# Altium PCB PMBV3.PcbDoc
Units mm, origin at the board's own origin, x right, y up, seen from the top; angles counter-clockwise.
Board outline 30 x 65 mm, 2 copper layers (Top Layer, Bottom Layer); 71 components, 30 nets, 160 pads, 96 vias.
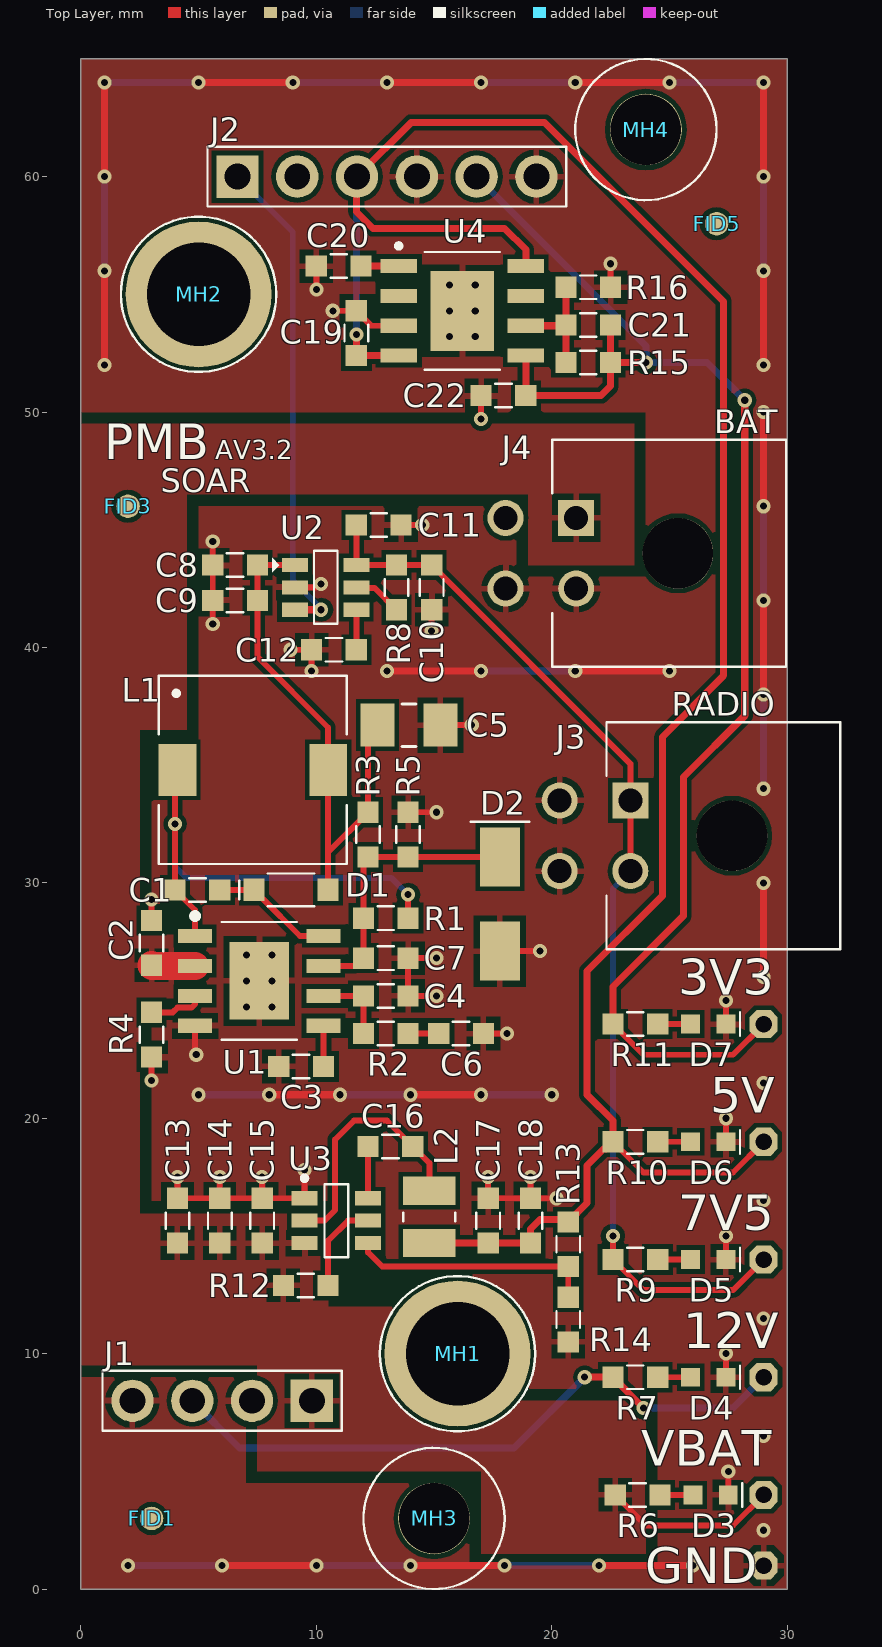
[diagram p0: Top Layer view]
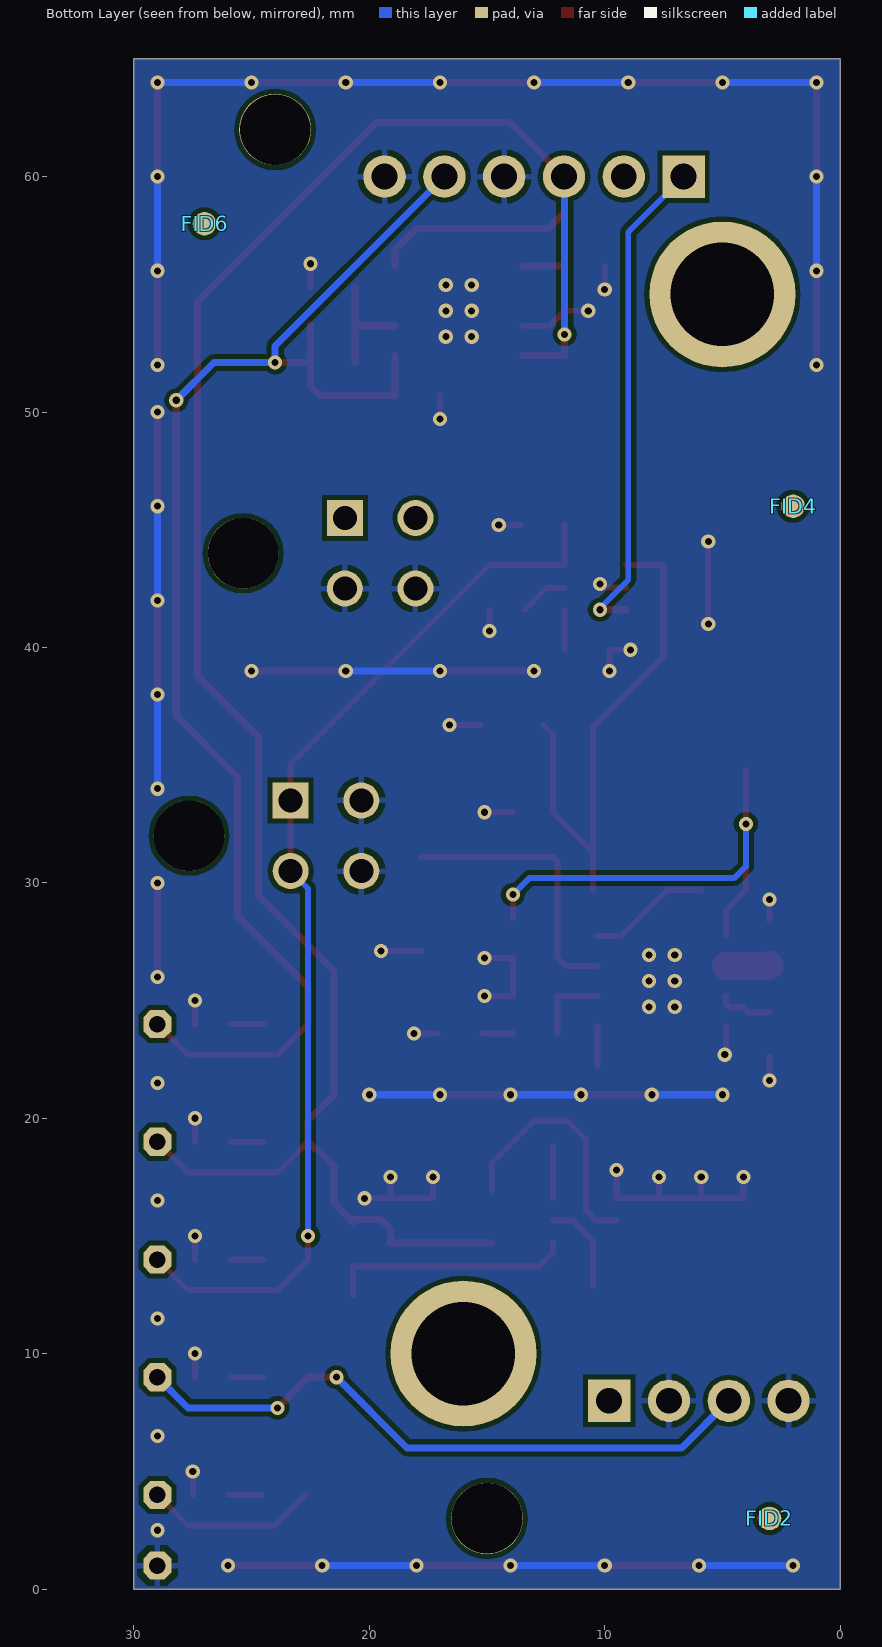
[diagram p1: Bottom Layer view, seen from below]
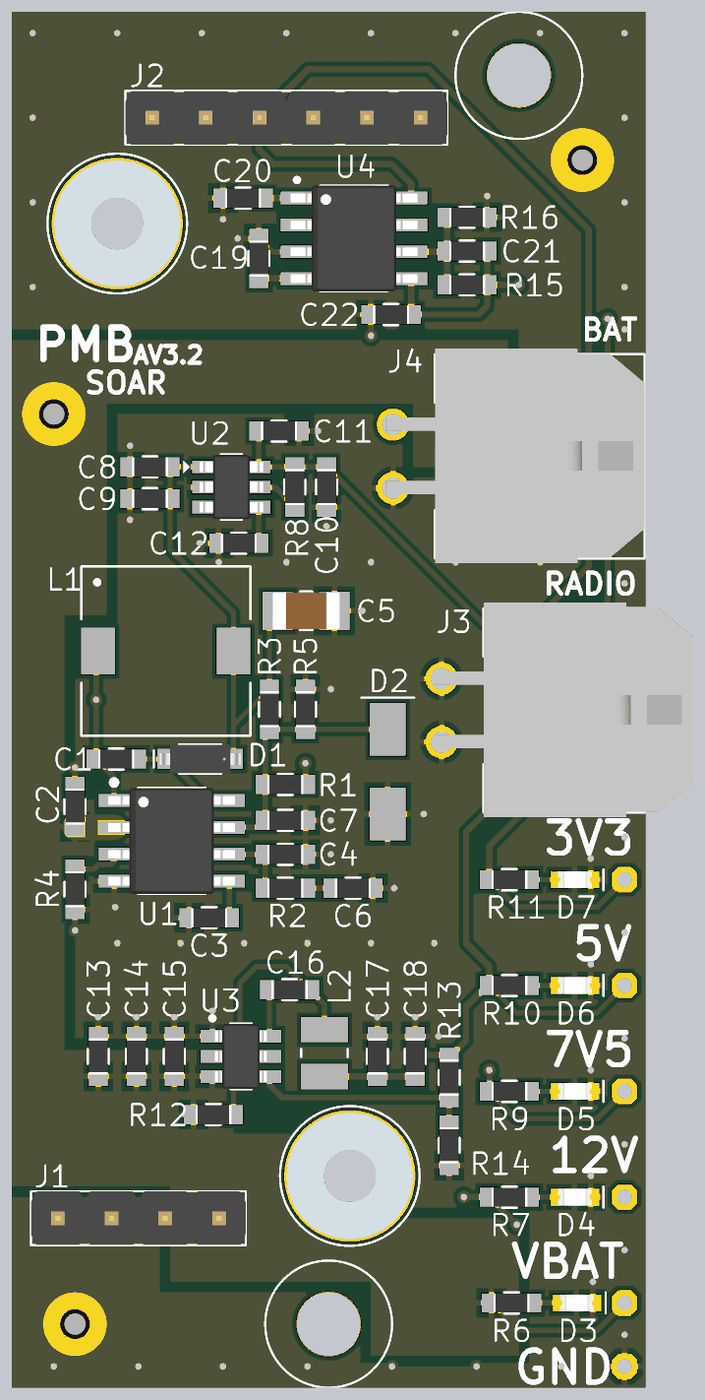
[diagram p2: 3D render of the assembled board from above, using the file's embedded part models]

## Layer stack, top to bottom
Top Solder: solder mask 0.0102, Solder Resist, Dk 3.5
Top Layer: signal copper 0.0356
Dielectric 1: dielectric 0.32, FR-4, Dk 4.8
Bottom Layer: signal copper 0.0356
Bottom Solder: solder mask 0.0102, Solder Resist, Dk 3.5

## Board outline
0,0 30,0 30,65 0,65

## Design rules (kind name [scope] priority, off if disabled: settings)
Clearance [All] p1: gap=0.2 ignorepadtopadclearanceinfootprint=FALSE except(0: Arc-Hole Track-Hole SMDPad-Hole THPad-Hole Via-Hole Fill-Hole Poly-Hole Region-Hole Text-Hole; 0.15: Arc-Arc Arc-Track Track-Track)
DiffPairsRouting [All] p1: maxlimit=0.25 minlimit=0.15 mostfreqgap=0.15 toplayer_minwidth=0.15 toplayer_maxwidth=0.25 toplayer_prefwidth=0.25 bottomlayer_minwidth=0.15 bottomlayer_maxwidth=0.25 bottomlayer_prefwidth=0.25 maxuncoupledlength=12.7
Height [All] p1: minheight=0 maxheight=30 prefheight=12.7
HoleSize [All] p1: absolutevalues=TRUE maxlimit=5 minlimit=0.3 maxpercent=80.000 minpercent=20.000
MinimumSolderMaskSliver [All] p1: minsoldermaskwidth=0.076
PolygonConnect [All] p1: thpad.connectstyle=Relief thpad.reliefconductorwidth=0.254 thpad.reliefentries=4 thpad.polygonreliefangle="90 Angle" thpad.airgapwidth=0.254 smdpad.connectstyle=Relief smdpad.reliefconductorwidth=0.254 smdpad.reliefentries=4 smdpad.polygonreliefangle="90 Angle" smdpad.airgapwidth=0.254 via.connectstyle=Direct via.reliefconductorwidth=0.254 via.reliefentries=4 via.polygonreliefangle="90 Angle" via.airgapwidth=0.254
RoutingVias [All] p1: holewidth=0.35 width=0.7 viastyle="Through Hole" minholewidth=0.25 minwidth=0.5 maxholewidth=0.711 maxwidth=1.27
SilkToSilkClearance [All] p1: silktosilkclearance=0.1
SilkToSolderMaskClearance [IsPad] p1: minsilkscreentomaskgap=0.09 clearancetoexposedcopper=TRUE
SolderMaskExpansion SolderMaskExpansion_Vias [IsVia] p1: expansion=0 istentingtop=TRUE
SolderMaskExpansion [All] p2: expansion=0.05 istentingtop=FALSE
Width [All] p1: maxlimit=2 minlimit=0.2 preferedwidth=0.25 minimp=50.000000 maximp=50.000000 favimp=50.000000
24 further rules are at their usual default settings.

## Components (designator, comment, footprint, x,y, rotation, side; value= is the part's Value field where it differs from the comment)
3V3 "Testpoint" Testpoint 29,24 r90 top locked
5V "Testpoint" Testpoint 29,19 r0 top locked
7V5 "Testpoint" Testpoint 29,14 r90 top locked
12V "Testpoint" Testpoint 29,9 r90 top locked
C1 "CGA3E3X7R1E334K080AB" 0603[1608] 4.95,29.7 r0 top
C2 "CL10A475KA8NQNC" 0603[1608] 3,27.45 r270 top
C3 "CC0603KRX7R9BB223" 0603[1608] 9.35,22.2 r0 top
C4 "CC0603JRNPO9BN220" 0603[1608] 12.95,25.2 r180 top
C5 "C3216X5R1E476M160AC" 1206[3216] 13.936,36.7 r180 top
C6 "CC0603KRX7R9BB821" 0603[1608] 16.15,23.6 r180 top
C7 "CC0603KRX7R9BB221" 0603[1608] 12.95,26.8 r180 top
C8 "CL10A106MP8NNNC" 0603[1608] 6.55,43.5 r0 top
C9 "CGA3E2X7R1E104K080AA" 0603[1608] 6.55,42 r0 top
C10 "CL10A105KP8NNNC" 0603[1608] 14.9,42.55 r90 top
C11 "CGA3E2X7R1E104K080AA" 0603[1608] 12.65,45.2 r180 top
C12 "CGA3E2X7R1H103K080AA" 0603[1608] 10.75,39.9 r180 top
C13 "CL10A106MP8NNNC" 0603[1608] 4.1,15.65 r270 top
C14 "CL10A106MP8NNNC" 0603[1608] 5.9,15.65 r270 top
C15 "CGA3E2X7R1E104K080AA" 0603[1608] 7.7,15.65 r270 top
C16 "CGA3E2X7R1E104K080AA" 0603[1608] 13.15,18.8 r0 top
C17 "C1608X5R1A226M080AC" 0603[1608] 17.3,15.65 r270 top
C18 "C1608X5R1A226M080AC" 0603[1608] 19.1,15.65 r270 top
C19 "CL10A475KA8NQNC" 0603[1608] 11.7,53.35 r270 top
C20 "GRM1885C1H103JA01D" 0603[1608] 10.95,56.2 r0 top
C21 "C0603C102K3GACTU" 0603[1608] 21.55,53.7 r0 top
C22 "CL10A106MP8NNNC" 0603[1608] 17.95,50.7 r0 top
D1 "1N4148W-7-F" 1N4148W-7-F 8.925,29.7 r180 top
D2 "B330A-13-F" B330A-13-F 17.8,29.1 r90 top
D3 "LTST-C191KGKT" LTST-C191KGKT 26.75,4 r180 top
D4 "LTST-C191KGKT" LTST-C191KGKT 26.65,9 r180 top
D5 "LTST-C191KGKT" LTST-C191KGKT 26.65,14 r180 top
D6 "LTST-C191KGKT" LTST-C191KGKT 26.65,19 r180 top
D7 "LTST-C191KGKT" LTST-C191KGKT 26.65,24 r180 top
FID1 "FID_1MM_ROUND_SL" FID_1MM_ROUND_SL 3,3 r0 top
FID2 "FID_1MM_ROUND_SL" FID_1MM_ROUND_SL 3,3 r90 bottom
FID3 "FID_1MM_ROUND_SL" FID_1MM_ROUND_SL 2,46 r90 top
FID4 "FID_1MM_ROUND_SL" FID_1MM_ROUND_SL 2,46 r90 bottom
FID5 "FID_1MM_ROUND_SL" FID_1MM_ROUND_SL 27,58 r90 top
FID6 "FID_1MM_ROUND_SL" FID_1MM_ROUND_SL 27,58 r90 bottom
GND "Testpoint" Testpoint 29,1 r90 top locked
J1 "61300411121" 61300411121 6,8 r180 top locked
J2 "61300611121" 61300611121 13,60 r0 top locked
J3 "0430450400" 0430450400 24,32 r90 top locked
J4 "0430450400" 0430450400 21.7,44 r90 top locked
L1 "744777003" 744777003 7.3,34.8 r90 top value=3.3uH
L2 "DFE252012P-4R7M=P2" DFE252012P-4R7M=P2 14.8,15.81 r270 top value=4.7uH
MH1 "9774110360R" Standoff 16,10 r0 top locked
MH2 "9774110360R" Standoff 5,55 r0 top locked
MH3 "Mounting Hole" MOUNT-HOLE 15,3 r0 top locked
MH4 "Mounting Hole" MOUNT-HOLE 24,62 r0 top locked
R1 "RC0603FR-071RL" 0603[1608] 12.95,28.5 r0 top
R2 "ERA-3AEB4752V" 0603[1608] 12.95,23.6 r180 top
R3 "RT0603DRE076K49L" 0603[1608] 12.2,32.05 r90 top
R4 "ERA-3AEB1582V" 0603[1608] 3,23.55 r90 top
R5 "RC0603FR-071KL" 0603[1608] 13.9,32.05 r270 top
R6 "ERA-3AEB2491V" 0603[1608] 23.65,4 r0 top
R7 "ERA-3AEB2491V" 0603[1608] 23.55,9 r0 top
R8 "CRGCQ0603F220R" 0603[1608] 13.4,42.55 r90 top
R9 "MCT06030C1301FP500" 0603[1608] 23.55,14 r0 top
R10 "ESR03EZPJ751" 0603[1608] 23.55,19 r0 top
R11 "RC1608F331CS" 0603[1608] 23.55,24 r0 top
R12 "ERJ-3GEYJ103V" 0603[1608] 9.55,12.9 r180 top
R13 "RC0603FR-0754K9L" 0603[1608] 20.7,14.65 r270 top
R14 "ERJ-3GEYJ103V" 0603[1608] 20.7,11.45 r90 top
R15 "ERJ-3EKF2211V" 0603[1608] 21.55,52.1 r0 top
R16 "RC0603FR-071KL" 0603[1608] 21.55,55.3 r180 top
U1 "SC4525ESETRT" SOIC127P600X175_HS-9N 7.575,25.835 r0 top
U2 "TPS22810DBVR" SOT95P280X145-6N 10.4,42.55 r0 top
U3 "TPS562208DDCT" TPS562208DDCT 10.85,15.65 r0 top
U4 "LP3878MRX-ADJ/NOPB" SOIC127P600X170_HS-9N 16.2,54.3 r0 top
VBAT "Testpoint" Testpoint 29,4 r90 top locked

## Footprints (in the part's own frame and the unit in brackets; to place one, negate y for a bottom-side part, rotate by r counter-clockwise, add the part's x,y. Pads: shape width x height; smd on the part's side, far side on the other; paste and mask are expansions set on the pad)
1N4148W-7-F [mm] "SOD123"
  rect 0.9x0.95 smd mask+0.05: 1(-1.575,0) 2(1.575,0)
  silkscreen extent -1,-0.7 2.2,0.7, body extent -1.92,-0.67 1.93,0.68, height 0.81
0603[1608] [mm]
  rect 0.9x0.9 smd mask+0.05: 1(-0.95,0) 2(0.95,0)
  silkscreen extent -0.35,-0.5 0.35,0.5, body extent -0.85,-0.45 0.85,0.45, height 0.55
1206[3216] [mm] "1206 Ceramic Capacitor"
  rect 1.44x1.82 smd: 1(-1.336,0) 2(1.336,0)
  silkscreen extent -0.29,-0.9 0.29,0.9, body extent -1.6,-0.9 1.6,0.9, height 1.6
0430450400 [mm] "4-Pin Molex 3.00mm Pitch"
  round 3 hole 3 unplated mask+0.05: 0(0,-3.66)
  rect 1.53x1.53 hole 1.02 mask+0.05: 1(1.5,0.66)
  round 1.53 hole 1.02 mask+0.05: 2(-1.5,0.66) 3(1.5,3.66) 4(-1.5,3.66)
  silkscreen extent -4.82,-8.25 4.83,1.67, body extent -5.05,-8.25 5.1,3.99, height 8.83
744777003 [mm] "SMT SHIELDED POWER INDUCTOR SIZE"
  rect 2.2x1.6 smd mask+0.05: 1(0,3.2) 2(0,-3.2)
  silkscreen extent -4,-4 4,4, body extent -4,-4 4,4, height 4.5
61300411121 [mm] "CONN HEADER VERT 4POS 2.54MM"
  rect 1.8x1.8 hole 1.1 mask+0.05: 1(-3.81,0)
  round 1.8 hole 1.1 mask+0.05: 2(-1.27,0) 3(1.27,0) 4(3.81,0)
  silkscreen extent -5.08,-1.27 5.08,1.27, body extent -5.08,-1.27 5.08,1.27, height 8.57
61300611121 [mm] "CONN HEADER VERT 6POS 2.54MM"
  rect 1.8x1.8 hole 1.1 mask+0.05: 1(-6.35,0)
  round 1.8 hole 1.1 mask+0.05: 2(-3.81,0) 3(-1.27,0) 4(1.27,0) 5(3.81,0) 6(6.35,0)
  silkscreen extent -7.62,-1.27 7.62,1.27, body extent -7.62,-1.27 7.62,1.27, height 8.57
B330A-13-F [mm] "DIODE SCHOTTKY 30V 3A SMA"
  rect 2.5x1.7 smd mask+0.05: 1(-2,0) 2(2,0)
  silkscreen extent 3.5,-1.25 3.5,1.25, body extent -2.75,-1.46 2.75,1.46, height 2.5
DFE252012P-4R7M=P2 [mm] "FIXED IND 4.7UH 2A 200 MOHM SMD"
  rect 1.2x2.22 smd: 1(-1.11,0) 2(1.11,0)
  silkscreen extent -0.19,-1.1 0.19,1.1, body extent -1.25,-1 1.25,1, height 1.2
FID_1MM_ROUND_SL [mm] "Fiducial 1MM Round Single Layer"
  round 1 smd mask+1: 0(0,0)
LTST-C191KGKT [mm] "Green 571nm LED Indication - Discrete 2V 0603"
  rect 0.8x0.8 smd paste-3 mask+0.05: 1(-0.75,0) 2(0.75,0)
  silkscreen extent -1.35,-0.5 -1.35,0.5, body extent -0.8,-0.4 0.8,0.4, height 0.8
MOUNT-HOLE [mil] "#4, 0.116in"
  round 120 hole 118 unplated mask+1.97: 0(0,0)
  silkscreen extent -118,-118 118,118, body extent 0,128 0,128, height 10
SOIC127P600X170_HS-9N [mm] "SOIC, 8-Leads, Body 4.90x3.90mm, Pitch 1.27mm, Thermal Pad 3.40x2.71mm, IPC Medium Density"
  rect 1.55x0.6 smd: 1(-2.7,1.905) 2(-2.7,0.635) 3(-2.7,-0.635) 4(-2.7,-1.905) 5(2.7,-1.905) 6(2.7,-0.635) 7(2.7,0.635) 8(2.7,1.905)
  rect 2.71x3.4 smd: 9(0,0)
  silkscreen extent -2.8,-2.5 1.6,2.85, body extent -3,-2.5 3,2.5, height 1.7
SOIC127P600X175_HS-9N [mm] "SOIC, 8-Leads, Body 4.90x3.90mm, Pitch 1.27mm, Thermal Pad 3.30x2.51mm, IPC Medium Density"
  rect 1.45x0.6 smd: 1(-2.725,1.905) 2(-2.725,0.635) 3(-2.725,-0.635) 4(-2.725,-1.905) 5(2.725,-1.905) 6(2.725,-0.635) 7(2.725,0.635) 8(2.725,1.905)
  rect 2.51x3.3 smd: 9(0,0)
  silkscreen extent -2.85,-2.5 1.6,2.88, body extent -3,-2.5 3,2.5, height 1.75
SOT95P280X145-6N [mm] "SOT23, 6-Leads, Body 2.90x2.80mm, Pitch 0.95mm, IPC Medium Density"
  rect 1.1x0.6 smd mask+0.07: 1(-1.3,0.95) 2(-1.3,0) 3(-1.3,-0.95) 4(1.3,-0.95) 5(1.3,0) 6(1.3,0.95)
  silkscreen extent -2.27,-1.55 0.5,1.55, body extent -1.5,-1.53 1.5,1.53, height 1.45
Standoff [mm] "#4, 0.116in"
  round 6.2 hole 4.4 unplated mask+0.05: 0(0,0)
  silkscreen extent -3.3,-3.3 3.3,3.3, body extent -3,-3 3,3, height 11
Testpoint [mm] "0.7MMD, 1.2MMW, 1.2MML"
  oct 1.2x1.2 hole 0.7 mask+0.05: 1(0,0)
TPS562208DDCT [mm] "IC REG BUCK ADJ 2A TSOT23-6"
  rect 1.1x0.6 smd: 1(-1.35,0.95) 2(-1.35,0) 3(-1.35,-0.95) 4(1.35,-0.95) 5(1.35,0) 6(1.35,0.95)
  silkscreen extent -1.45,-1.55 0.5,1.9, body extent -1.25,-1.52 1.25,1.53, height 1.1

## Part data
3V3 5V 7V5 12V GND VBAT: "TESTPOINT 0.7MMD Hole, 1.2MMW, 1.2MML"
C1: "CAP CER 0.33UF 25V X7R 0603", Capacitance=0.33µF, Manufacturer="TDK Corporation", Operating Temperature="-55°C ~ 125°C", Package / Case="0603 (1608 Metric)", Supplier Part Number 1=445-12544-1-ND, Temperature Coefficient=X7R, Tolerance=±10%, Voltage - Rated=25V, ComponentLink1Description=Datasheet, ComponentLink1URL=https://content.kemet.com/datasheets/KEM_C1003_C0G_SMD.pdf, Manufacturer Part Number=CGA3E3X7R1E334K080AB, Mounting Type="Surface Mount, MLCC", Size / Dimension="0.063\" L x 0.031\" W (1.60mm x 0.80mm)", Supplier 1=Digi-Key, Thickness (Max)="0.034\" (0.87mm)"
C2 C19: "CAP CER 4.7UF 25V X5R 0603", Capacitance=4.7uF, Manufacturer="Samsung Electro-Mechanics", Operating Temperature="-55°C ~ 85°C", Package / Case="0603 (1608 Metric)", Supplier Part Number 1=1276-1900-1-ND, Temperature Coefficient=X5R, Tolerance=±10%, Voltage - Rated=25V, ComponentLink1Description=Datasheet, ComponentLink1URL=http://www.samsungsem.com/kr/support/product-search/mlcc/__icsFiles/afieldfile/2019/05/10/19-CL10A475KA8NQNC.pdf, Manufacturer Part Number=CL10A475KA8NQNC, Mounting Type="Surface Mount, MLCC", Size / Dimension="0.063\" L x 0.031\" W (1.60mm x 0.80mm)", Supplier 1=Digi-Key, Thickness (Max)="0.035\" (0.90mm)"
C3: "CAP CER 0.022UF 50V X7R 0603", Capacitance=22nF, Manufacturer=Yageo, Operating Temperature="-55°C ~ 125°C", Package / Case="0603 (1608 Metric)", Supplier Part Number 1=311-1370-1-ND, Temperature Coefficient=X7R, Tolerance=±10%, Voltage - Rated=50V, ComponentLink1Description=Datasheet, ComponentLink1URL=https://www.yageo.com/upload/media/product/productsearch/datasheet/mlcc/UPY-GP_NP0_16V-to-50V_18.pdf, Manufacturer Part Number=CC0603KRX7R9BB223, Mounting Type="Surface Mount, MLCC", Size / Dimension="0.063\" L x 0.031\" W (1.60mm x 0.80mm)", Supplier 1=Digi-Key, Thickness (Max)="0.035\" (0.90mm)"
C4: "CAP CER 22PF 50V C0G/NPO 0603", Capacitance=22pF, Manufacturer=Yageo, Operating Temperature="-55°C ~ 125°C", Package / Case="0603 (1608 Metric)", Supplier Part Number 1=311-1062-1-ND, Temperature Coefficient="C0G, NP0", Tolerance=±5%, Voltage - Rated=50V, ComponentLink1Description=Datasheet, ComponentLink1URL=https://www.yageo.com/upload/media/product/productsearch/datasheet/mlcc/UPY-GP_NP0_16V-to-50V_18.pdf, Manufacturer Part Number=CC0603JRNPO9BN220, Mounting Type="Surface Mount, MLCC", Size / Dimension="0.063\" L x 0.031\" W (1.60mm x 0.80mm)", Supplier 1=Digi-Key, Thickness (Max)="0.035\" (0.90mm)"
C5: "CAP CER 47UF 25V X5R 1206", Capacitance=47µF, Manufacturer="TDK Corporation", Operating Temperature="-55°C ~ 85°C", Package / Case="1206 (3216 Metric)", Supplier Part Number 1=445-8047-1-ND, Temperature Coefficient=X5R, Tolerance=±20%, Voltage - Rated=25V, ComponentLink1Description=Datasheet, ComponentLink1URL=http://www.samsungsem.com/kr/support/product-search/mlcc/__icsFiles/afieldfile/2019/05/10/19-CL10A105KP8NNNC.pdf, Manufacturer Part Number=C3216X5R1E476M160AC, Mounting Type="Surface Mount, MLCC", Size / Dimension="0.126\" L x 0.063\" W (3.20mm x 1.60mm)", Supplier 1=Digi-Key, Thickness (Max)="0.071\" (1.80mm)"
C6: "CAP CER 820PF 50V X7R 0603", Capacitance=820pF, Manufacturer=Yageo, Operating Temperature="-55°C ~ 125°C", Package / Case="0603 (1608 Metric)", Supplier Part Number 1=311-1189-1-ND, Temperature Coefficient=X7R, Tolerance=±10%, Voltage - Rated=50V, ComponentLink1Description=Datasheet, ComponentLink1URL=https://www.yageo.com/upload/media/product/productsearch/datasheet/mlcc/UPY-GP_NP0_16V-to-50V_18.pdf, Manufacturer Part Number=CC0603KRX7R9BB821, Mounting Type="Surface Mount, MLCC", Size / Dimension="0.063\" L x 0.031\" W (1.60mm x 0.80mm)", Supplier 1=Digi-Key, Thickness (Max)="0.035\" (0.90mm)"
C7: "CAP CER 220PF 50V X7R 0603", Capacitance=220pF, Manufacturer=Yageo, Operating Temperature="-55°C ~ 125°C", Package / Case="0603 (1608 Metric)", Supplier Part Number 1=311-1077-1-ND, Temperature Coefficient=X7R, Tolerance=±10%, Voltage - Rated=50V, ComponentLink1Description=Datasheet, ComponentLink1URL=https://www.yageo.com/upload/media/product/productsearch/datasheet/mlcc/UPY-GP_NP0_16V-to-50V_18.pdf, Manufacturer Part Number=CC0603KRX7R9BB221, Mounting Type="Surface Mount, MLCC", Size / Dimension="0.063\" L x 0.031\" W (1.60mm x 0.80mm)", Supplier 1=Digi-Key, Thickness (Max)="0.035\" (0.90mm)"
C8 C13 C14 C22: "CAP CER 10UF 10V X5R 0603", Capacitance=10µF, Manufacturer="Samsung Electro-Mechanics", Operating Temperature="-55°C ~ 85°C", Package / Case="0603 (1608 Metric)", Supplier Part Number 1=1276-1871-1-ND, Temperature Coefficient=X5R, Tolerance=±20%, Voltage - Rated=10V, ComponentLink1Description=Datasheet, ComponentLink1URL=https://static6.arrow.com/aropdfconversion/f91a1722e2705c3d73cfb1979021b64ae4055093/19-cl10a106mp8nnnc.pdf, Manufacturer Part Number=CL10A106MP8NNNC, Mounting Type="Surface Mount, MLCC", Size / Dimension="0.063\" L x 0.031\" W (1.60mm x 0.80mm)", Supplier 1=Digi-Key, Thickness (Max)="0.035\" (0.90mm)"
C9 C11 C15 C16: "CAP CER 0.1UF 25V X7R 0603", Capacitance=0.1µF, Manufacturer="TDK Corporation", Operating Temperature="-55°C ~ 125°C", Package / Case="0603 (1608 Metric)", Supplier Part Number 1=445-5667-1-ND, Temperature Coefficient=X7R, Tolerance=±10%, Voltage - Rated=25V, ComponentLink1Description=Datasheet, ComponentLink1URL=https://product.tdk.com/info/en/catalog/spec/mlccspec_automotive_general_en.pdf, Manufacturer Part Number=CGA3E2X7R1E104K080AA, Mounting Type="Surface Mount, MLCC", Size / Dimension="0.063\" L x 0.031\" W (1.60mm x 0.80mm)", Supplier 1=Digi-Key, Thickness (Max)="0.035\" (0.90mm)"
C10: "CAP CER 1UF 10V X5R 0603", Capacitance=1uF, Manufacturer="Samsung Electro-Mechanics", Operating Temperature="-55°C ~ 85°C", Package / Case="0603 (1608 Metric)", Supplier Part Number 1=1276-1182-1-ND, Temperature Coefficient=X5R, Tolerance=±10%, Voltage - Rated=10V, ComponentLink1Description=Datasheet, ComponentLink1URL=http://www.samsungsem.com/kr/support/product-search/mlcc/__icsFiles/afieldfile/2019/05/10/19-CL10A105KP8NNNC.pdf, Manufacturer Part Number=CL10A105KP8NNNC, Mounting Type="Surface Mount, MLCC", Size / Dimension="0.063\" L x 0.031\" W (1.60mm x 0.80mm)", Supplier 1=Digi-Key, Thickness (Max)="0.035\" (0.90mm)"
C12: "CAP CER 10000PF 50V X7R 0603", Capacitance=10000pF, Manufacturer="TDK Corporation", Operating Temperature="-55°C ~ 125°C", Package / Case="0603 (1608 Metric)", Supplier Part Number 1=445-5662-1-ND, Temperature Coefficient=X7R, Tolerance=±10%, Voltage - Rated=50V, ComponentLink1Description=Datasheet, ComponentLink1URL=https://product.tdk.com/info/en/catalog/spec/mlccspec_automotive_general_en.pdf, Manufacturer Part Number=CGA3E2X7R1H103K080AA, Mounting Type="Surface Mount, MLCC", Size / Dimension="0.063\" L x 0.031\" W (1.60mm x 0.80mm)", Supplier 1=Digi-Key, Thickness (Max)="0.035\" (0.90mm)"
C17 C18: "CAP CER 22UF 10V X5R 0603", Capacitance=22uF, Manufacturer="TDK Corporation", Operating Temperature="-55°C ~ 85°C", Package / Case="0603 (1608 Metric)", Supplier Part Number 1=445-9077-1-ND, Temperature Coefficient=X5R, Tolerance=±20%, Voltage - Rated=10V, ComponentLink1Description=Datasheet, ComponentLink1URL=http://datasheets.avx.com/C0GNP0-Dielectric.pdf, Manufacturer Part Number=C1608X5R1A226M080AC, Mounting Type="Surface Mount, MLCC", Size / Dimension="0.063\" L x 0.031\" W (1.60mm x 0.80mm)", Supplier 1=Digi-Key, Thickness (Max)="0.039\" (1.00mm)"
C20: "CAP CER 10000PF 50V C0G/NP0 0603", Capacitance=10nF, Manufacturer="Murata Electronics", Operating Temperature="-55°C ~ 125°C", Package / Case="0603 (1608 Metric)", Supplier Part Number 1=490-9666-1-ND, Temperature Coefficient="C0G, NP0", Tolerance=±50%, Voltage - Rated=50V, ComponentLink1Description=Datasheet, ComponentLink1URL=https://www.murata.com/~/media/webrenewal/support/library/catalog/products/capacitor/mlcc/c02e.ashx?la=en-us, Manufacturer Part Number=GRM1885C1H103JA01D, Mounting Type="Surface Mount, MLCC", Size / Dimension="0.063\" L x 0.031\" W (1.60mm x 0.80mm)", Supplier 1=Digi-Key, Thickness (Max)="0.035\" (0.90mm)"
C21: "CAP CER 1000PF 25V C0G/NP0 0603", Capacitance=1000pF, Manufacturer=KEMET, Operating Temperature="-55°C ~ 85°C", Package / Case="0603 (1608 Metric)", Supplier Part Number 1=399-7833-1-ND, Temperature Coefficient="C0G, NP0", Tolerance=±10%, Voltage - Rated=25V, ComponentLink1Description=Datasheet, ComponentLink1URL=https://content.kemet.com/datasheets/KEM_C1003_C0G_SMD.pdf, Manufacturer Part Number=C0603C102K3GACTU, Mounting Type="Surface Mount, MLCC", Size / Dimension="0.063\" L x 0.031\" W (1.60mm x 0.80mm)", Supplier 1=Digi-Key, Thickness (Max)="0.034\" (0.87mm)"
D1: "DIODE GEN PURP 100V 300MA SOD123", Capacitance @ Vr, F="2pF @ 0V, 1MHz", Current - Average Rectified (Io)="300mA (DC)", Current - Reverse Leakage @ Vr="1µA @ 75V", Manufacturer="Diodes Incorporated", Operating Temperature - Junction="-65°C ~ 150°C", Package / Case=SOD-123, Supplier Part Number 1=1N4148W-FDICT-ND, Voltage - DC Reverse (Vr) (Max)=100V, Voltage - Forward (Vf) (Max) @ If="1.25V @ 150mA", ComponentLink1Description=Datasheet, ComponentLink1URL=https://www.diodes.com/assets/Datasheets/ds30086.pdf, Diode Type=Standard, Manufacturer Part Number=1N4148W-7-F, Mounting Type="Surface Mount", Reverse Recovery Time (trr)=4ns, Speed="Small Signal =< 200mA (Io), Any Speed", Supplier 1=Digi-Key
D2: "DIODE SCHOTTKY 30V 3A SMA", Capacitance @ Vr, F="200pF @ 4V, 1MHz", Current - Average Rectified (Io)=3A, Current - Reverse Leakage @ Vr="500µA @ 30V", Manufacturer="Diodes Incorporated", Operating Temperature - Junction="-55°C ~ 150°C", Package / Case="DO-214AC, SMA", Supplier Part Number 1=B330A-FDICT-ND, Voltage - DC Reverse (Vr) (Max)=30V, Voltage - Forward (Vf) (Max) @ If="500mV @ 3A", 500mV @ 3A="Fast Recovery =< 500ns, > 200mA (Io)", ComponentLink1Description=Datasheet, ComponentLink1URL=https://www.diodes.com/assets/Datasheets/ds30891.pdf, Manufacturer Part Number=B330A-13-F, Mounting Type="Surface Mount", Supplier 1=Digi-Key, Type=Schottky
D3 D4 D5 D6 D7: "LED GREEN CLEAR SMD 0603", Colour=Green, Current - Test=20mA, Lens Color=Colourless, Manufacturer="Lite-On Inc.", Millicandela Rating=35mcd, Package / Case="0603 (1608 Metric)", Supplier Part Number 1=160-1446-1-ND, Voltage - Forward (Vf) (Typ)=2V, ComponentLink1Description=Datasheet, ComponentLink1URL=http://optoelectronics.liteon.com/upload/download/DS22-2000-228/LTST-C191KGKT.PDF, Height (Max)=0.65mm, Lens Size="1.10mm x 0.80mm", Lens Style="Rectangle with Flat Top", Lens Transparency=Clear, Manufacturer Part Number=LTST-C191KGKT, Mounting Type="Surface Mount", Size / Dimension="1.60mm L x 0.80mm W", Supplier 1=Digi-Key, Viewing Angle=130°, Wavelength - Dominant=571nm, Wavelength - Peak=574nm
FID1 FID2 FID3 FID4 FID5 FID6: "Fiducial 1mm Round Single Layer"
J1: "CONN HEADER VERT 4POS MALE 2.54MM", Current Rating (Amps)=3A, Insulation Color=Black, Manufacturer="Würth Elektronik", Material Flammability Rating="UL94 V-0", Operating Temperature="-40°C ~ 105°C", Supplier Part Number 1=732-5317-ND, Voltage Rating=250V, ComponentLink1Description=Drawing, ComponentLink1URL=https://www.we-online.de/katalog/datasheet/6130xx11121.pdf, Connector Type=Header, Contact Finish - Mating=Gold, Contact Length - Mating="0.236\" (6.00mm)", Contact Length - Post="0.118\" (3.00mm)", Contact Material="Copper Alloy", Contact Shape=Square, Contact Type="Male Pin", Fastening Type=Push-Pull, Insulation Height="0.100\" (2.54mm)", Insulation Material="Polybutylene Terephthalate (PBT)", Manufacturer Part Number=61300411121, Mounting Type="Through Hole", Number of Positions=4, Number of Rows=1, Overall Contact Length="0.454\" (11.54mm)", Pitch - Mating="0.100\" (2.54mm)", Shrouding=Unshrouded, Style="Board to Board or Cable", Supplier 1=Digi-Key, Termination=Solder
J2: "CONN HEADER VERT 6POS MALE 2.54MM", Current Rating (Amps)=3A, Insulation Color=Black, Manufacturer="Würth Elektronik", Material Flammability Rating="UL94 V-0", Operating Temperature="-40°C ~ 105°C", Supplier Part Number 1=732-5319-ND, Voltage Rating=250V, ComponentLink1Description=Drawing, ComponentLink1URL=https://www.we-online.de/katalog/datasheet/6130xx11121.pdf, Connector Type=Header, Contact Finish - Mating=Gold, Contact Length - Mating="0.236\" (6.00mm)", Contact Length - Post="0.118\" (3.00mm)", Contact Material="Copper Alloy", Contact Shape=Square, Contact Type="Male Pin", Fastening Type=Push-Pull, Insulation Height="0.100\" (2.54mm)", Insulation Material="Polybutylene Terephthalate (PBT)", Manufacturer Part Number=61300611121, Mounting Type="Through Hole", Number of Positions=6, Number of Rows=1, Overall Contact Length="0.454\" (11.54mm)", Pitch - Mating="0.100\" (2.54mm)", Shrouding=Unshrouded, Style="Board to Board or Cable", Supplier 1=Digi-Key, Termination=Solder
J3 J4: "CONN HEADER R/A 4POS 3MM", Current Rating (Amps)=8A, Insulation Color=Black, Manufacturer=Molex, Material Flammability Rating="UL94 V-0", Supplier Part Number 1=WM1814-ND, Voltage Rating=600V, ComponentLink1Description=Datasheet, ComponentLink1URL=https://www.molex.com/pdm_docs/sd/430450400_sd.pdf, ComponentLink2Description="Product Specification", ComponentLink2URL=https://www.molex.com/pdm_docs/ps/PS-43045.pdf, Contact Finish - Mating=Tin, Contact Finish - Post=Tin, Contact Finish Thickness - Mating="100.0µin (2.54µm)", Contact Length - Post="0.125\" (3.18mm)", Contact Material=Brass, Contact Shape=Square, Contact Type="0.118\" (3.00mm)", Fastening Type="Locking Ramp", Features="Board Lock", Insulation Height="0.290\" (7.37mm)", Insulation Material="Liquid Crystal Polymer (LCP), Glass Filled", Manufacturer Part Number=0430450400, Mounting Type="Through Hole, Right Angle", Number of Positions=4, Number of Rows=2, Row Spacing - Mating="0.118\" (3.00mm)", Shrouding="Shrouded - 4 Wall", Supplier 1=Digi-Key, Termination=Solder
L1: "SMT SHIELDED POWER INDUCTOR SIZE", Current - Saturation=4.6A, Current Rating (Amps)=3.5A, DC Resistance (DCR)="30mOhm Max", Inductance Frequency - Test=55MHz, Manufacturer="Würth Elektronik", Operating Temperature="-40°C ~ 125°C", Ratings=AEC-Q200, Supplier Device Package=7345, Supplier Part Number 1=732-13497-1-ND, Tolerance=+-20%, ComponentLink1Description=Datasheet, ComponentLink1URL=https://www.we-online.com/catalog/datasheet/744777003.pdf, Height - Seated (Max)="0.177\"\" (4.50mm)", Material - Core=Ferrite, Mounting Type="Surface Mount", Series=744777003, Shielding=Shielded, Size/Dimension="0.287\"\" L x 0.287\"\" W (7.30mm x 7.30mm)", Supplier 1=Digi-Key, Type=Wirewound
L2: "FIXED IND 4.7UH 2A 200 MOHM SMD", Current Rating (Amps)=2A, DC Resistance (DCR)="200mOhm Max", Inductance Frequency - Test=1MHz, Manufacturer="Murata Electronics", Manufacturer Part Number=DFE252012P-4R7M=P2, Operating Temperature="-40C to 125C", Supplier Part Number 1=490-10651-1-ND, Tolerance=+-20%, Height - Seated (Max)="0.047\" (1.20mm)", Material - Core="Iron Powder", Mounting Type="Surface Mount", Series=DFE252012P, Shielding=Shielded, Size/Dimension="0.098\" L x 0.079\" W (2.50mm x 2.00mm)", Supplier 1=Digi-Key, Type=Wirewound
MH1 MH2: "ROUND STANDOFF M3X0.5 STEEL 11MM", Manufacturer="Würth Elektronik", Supplier Part Number 1=732-5278-1-ND, Between Board Height="0.433\" (11.00mm)", ComponentLink1Description=Datasheet, ComponentLink1URL=https://www.keyelco.com/userAssets/file/M65p77.pdf, Diameter - Outside="0.236\" (5.99mm)", Features="Surface Mount", Gender=Female, Length - Overall="0.488\" (12.40mm)", Manufacturer Part Number=9774110360R, Material=Steel, Screw, Thread Size=M3x0.5, Supplier 1=Digi-Key, Threaded/Unthreaded=Threaded, Type="Round Standoff"
MH3 MH4: "#4 Screw, 0.116in Diameter"
R1: "RES SMD 1 OHM 1% 1/10W 0603", Manufacturer=Yageo, Operating Temperature="-55°C ~ 155°C", Package="0603 (1608 Metric)", Power  (W)=0.1W, Resistance=1, Supplier Part Number 1=311-1.00HRCT-ND, Temperature Coefficient=±200ppm/°C, Tolerance=±1%, ComponentLink1Description=Datasheet, ComponentLink1URL=https://www.yageo.com/upload/media/product/productsearch/datasheet/rchip/PYu-RC_Group_51_RoHS_L_10.pdf, Composition="Thick Film", Manufacturer Part Number=RC0603FR-071RL, Supplier 1=Digi-Key
R2: "RES SMD 47.5KOHM 0.1% 1/10W 0603", Manufacturer="Panasonic Electronic Components", Operating Temperature="-55°C ~ 155°C", Package="0603 (1608 Metric)", Power  (W)=0.1W, Resistance=47.5K, Supplier Part Number 1=P47.5KDBCT-ND, Temperature Coefficient=±25ppm/°C, Tolerance=±0.1%, ComponentLink1Description=Datasheet, ComponentLink1URL=https://industrial.panasonic.com/cdbs/www-data/pdf/RDM0000/AOA0000C307.pdf, Composition="Thin Film", Manufacturer Part Number=ERA-3AEB4752V, Supplier 1=Digi-Key
R3: "RES SMD 6.49KOHM 0.5% 1/10W 0603", Manufacturer=Yageo, Operating Temperature="-55°C ~ 155°C", Package="0603 (1608 Metric)", Power  (W)=0.1W, Resistance=6.49K, Supplier Part Number 1=311-2658-1-ND, Temperature Coefficient=±500ppm/°C, Tolerance=±0.5%, ComponentLink1Description=Datasheet, ComponentLink1URL=https://4donline.ihs.com/images/VipMasterIC/IC/YAGO/YAGO-S-A0008510989/YAGO-S-A0008510989-1.pdf?hkey=52A5661711E402568146F3353EA87419, Composition="Thick Film", Manufacturer Part Number=RT0603DRE076K49L, Supplier 1=Digi-Key
R4: "RES SMD 15.8KOHM 0.1% 1/10W 0603", Manufacturer="Panasonic Electronic Components", Operating Temperature="-55°C ~ 155°C", Package="0603 (1608 Metric)", Power  (W)=0.1W, Resistance=15.8K, Supplier Part Number 1=P15.8KDBCT-ND, Temperature Coefficient=±25ppm/°C, Tolerance=±0.1%, ComponentLink1Description=Datasheet, ComponentLink1URL=https://industrial.panasonic.com/cdbs/www-data/pdf/RDM0000/AOA0000C307.pdf, Composition="Thin Film", Manufacturer Part Number=ERA-3AEB1582V, Supplier 1=Digi-Key
R5 R16: "RES SMD 1K OHM 1% 1/10W 0603", Manufacturer=Yageo, Operating Temperature="-55°C ~ 155°C", Package="0603 (1608 Metric)", Power  (W)=0.1W, Resistance=1K, Supplier Part Number 1=311-30.0KHRCT-ND, Temperature Coefficient=±100ppm/°C, Tolerance=±1%, ComponentLink1Description=Datasheet, ComponentLink1URL=https://www.yageo.com/upload/media/product/productsearch/datasheet/rchip/PYu-RC_Group_51_RoHS_L_10.pdf, Composition="Thick Film", Manufacturer Part Number=RC0603FR-071KL, Supplier 1=Digi-Key
R6 R7: "RES SMD 2.49KOHM 0.1% 1/10W 0603", Manufacturer="Panasonic Electronic Components", Operating Temperature="-55°C ~ 155°C", Package="0603 (1608 Metric)", Power  (W)=0.1W, Resistance=2.49K, Supplier Part Number 1=P2.49KDBCT-ND, Temperature Coefficient=±25ppm/°C, Tolerance=±0.1%, ComponentLink1Description=Datasheet, ComponentLink1URL=https://industrial.panasonic.com/cdbs/www-data/pdf/RDM0000/AOA0000C307.pdf, Composition="Thin Film", Manufacturer Part Number=ERA-3AEB2491V, Supplier 1=Digi-Key
R8: "CRGCQ 0603 220R 1%", Manufacturer="TE Connectivity Passive Product", Operating Temperature="-55°C ~ 155°C", Package="0603 (1608 Metric)", Power  (W)=0.1W, Resistance=220, Supplier Part Number 1=A129680CT-ND, Temperature Coefficient=±100ppm/°C, Tolerance=±1%, ComponentLink1Description=Datasheet, ComponentLink1URL=https://www.yageo.com/upload/media/product/productsearch/datasheet/rchip/PYu-RC_Group_51_RoHS_L_10.pdf, Composition="Thick Film", Manufacturer Part Number=CRGCQ0603F220R, Supplier 1=Digi-Key
R9: "RES SMD 1.3K OHM 1% 1/8W 0603", Manufacturer="Vishay Beyschlag", Operating Temperature="-55°C ~ 155°C", Package="0603 (1608 Metric)", Power  (W)=1/8W, Resistance=1.3K, Supplier Part Number 1=749-1605-1-ND, Temperature Coefficient=±50ppm/°C, Tolerance=±1%, ComponentLink1Description=Datasheet, ComponentLink1URL=http://www.vishay.com/docs/28705/mcx0x0xpro.pdf, Composition="Thin Film", Manufacturer Part Number=MCT06030C1301FP500, Supplier 1=Digi-Key
R10: "RES SMD 750 OHM 5% 1/4W 0603", Manufacturer="Rohm Semiconductor", Operating Temperature="-55°C ~ 155°C", Package="0603 (1608 Metric)", Power  (W)=0.25W, Resistance=750, Supplier Part Number 1=RHM750DCT-ND, Temperature Coefficient=±200ppm/°C, Tolerance=±5%, ComponentLink1Description=Datasheet, ComponentLink1URL=https://d1d2qsbl8m0m72.cloudfront.net/en/products/databook/datasheet/passive/resistor/chip_resistor/esr-e.pdf, Composition="Thick Film", Manufacturer Part Number=ESR03EZPJ751, Supplier 1=Digi-Key
R11: "RES SMD 330 OHM 1% 1/10W 0603", Manufacturer="Samsung Electro-Mechanics", Operating Temperature="-55°C ~ 155°C", Package="0603 (1608 Metric)", Power  (W)=0.1W, Resistance=330, Supplier Part Number 1=1276-4604-2-ND, Temperature Coefficient=±100ppm/°C, Tolerance=±1%, ComponentLink1Description=Datasheet, ComponentLink1URL=http://www.samsungsem.com/kr/support/product-search/chip-resistor/__icsFiles/afieldfile/2019/01/21/RC_Spec_Sheet(1901).pdf, Composition="Thick Film", Manufacturer Part Number=RC1608F331CS, Supplier 1=Digi-Key
R12 R14: "RES SMD 10K OHM 5% 1/10W 0603", Manufacturer="Panasonic Electronic Components", Operating Temperature="-55°C ~ 155°C", Package="0603 (1608 Metric)", Power  (W)=0.1W, Resistance=10K, Supplier Part Number 1=P10KGCT-ND, Temperature Coefficient=±200ppm/°C, Tolerance=±5%, ComponentLink1Description=Datasheet, ComponentLink1URL=http://www.yageo.com/documents/recent/PYu-RC_Group_51_RoHS_L_9.pdf, Composition="Thick Film", Manufacturer Part Number=ERJ-3GEYJ103V, Supplier 1=Digi-Key
R13: "RES SMD 54.9K OHM 1% 1/10W 0603", Manufacturer=Yageo, Operating Temperature="-55°C ~ 155°C", Package="0603 (1608 Metric)", Power  (W)=0.1W, Resistance=54.9K, Supplier Part Number 1=311-54.9KHRDKR-ND, Temperature Coefficient=±100ppm/°C, Tolerance=±1%, ComponentLink1Description=Datasheet, ComponentLink1URL=https://www.yageo.com/upload/media/product/productsearch/datasheet/rchip/PYu-RC_Group_51_RoHS_L_10.pdf, Composition="Thick Film", Manufacturer Part Number=RC0603FR-0754K9L, Supplier 1=Digi-Key
R15: "RES SMD 2.21K OHM 1% 1/10W 0603", Manufacturer="Panasonic Electronic Components", Manufacturer Part Number=ERJ-3GEYJ103V, Operating Temperature="-55°C ~ 155°C", Package="0603 (1608 Metric)", Power  (W)=0.1W, Resistance=2.21K, Supplier Part Number 1=P10KGCT-ND, Temperature Coefficient=±100ppm/°C, Tolerance=±1%, ComponentLink1Description=Datasheet, ComponentLink1URL=https://industrial.panasonic.com/cdbs/www-data/pdf/RDA0000/AOA0000C304.pdf, Composition="Thick Film", Supplier 1=Digi-Key
U1: "IC REG BUCK ADJUSTABLE 3A 8SOIC", Manufacturer="Semtech Corporation", ComponentLink1Description=Datasheet, ComponentLink1URL=https://semtech.my.salesforce.com/sfc/p/#E0000000JelG/a/2R0000001Nr2/6kOzpjdk.AJmLpgrGiFAWW58LpG5sa.kG4035Q65fV4, Manufacturer Part Number=SC4525ESETRT
U2: "IC PWR SWITCH N-CHAN 1:1 SOT23-6", Manufacturer="Texas Instruments", ComponentLink1Description=Datasheet, ComponentLink1URL=http://www.ti.com/lit/ds/symlink/tps22810.pdf, Manufacturer Part Number=TPS22810DBVR
U3: "IC REG BUCK ADJ 2A TSOT23-6", Current - Output=2A, Frequency - Switching=580kHz, Manufacturer="Texas Instruments", Operating Temperature="-40°C ~ 125°C (TJ)", Supplier Part Number 1=296-43806-1-ND, Voltage - Input (Max)=17V, Voltage - Input (Min)=4.5V, Voltage - Output (Min/Fixed)=0.768V, ComponentLink1Description=Datasheet, ComponentLink1URL=http://www.ti.com/general/docs/suppproductinfo.tsp?distId=10&gotoUrl=http%3A%2F%2Fwww.ti.com%2Flit%2Fgpn%2Ftps562208, Function=Step-Down, Mounting Type="Surface Mount", Number of Outputs=1, Output Configuration=Positive, Output Type=Adjustable, Packaging="Cut Tape (CT)", Series="D-CAP2™, Eco-Mode™", Supplier 1=Digi-Key, Synchronous Rectifier=Yes, Topology=Buck, Voltage - Output (Max)=17V
U4: "IC REG LIN POS ADJ 800MA 8SO", Base Part Number=LP3878, Current - Output=800mA, Current - Quiescent (Iq)=1.5mA, Current - Supply (Max)=15mA, Manufacturer="Texas Instruments", Operating Temperature="-40°C ~ 125°C", Package / Case="8-PowerSOIC (0.154\", 3.90mm Width)", Supplier Part Number 1=LP3878MRX-ADJ/NOPBTR-ND, Voltage - Input (Max)=16V, Voltage - Output (Max)=5.5V, Voltage - Output (Min/Fixed)=1V, Voltage Dropout (Max)="1.1V @ 800mA", ComponentLink1Description=Datasheet, ComponentLink1URL=http://www.ti.com/lit/ds/symlink/lp3878-adj.pdf, Control Features=Enable, Manufacturer Part Number=LP3878MRX-ADJ/NOPB, Mounting Type="Surface Mount", Number of Regulators=1, Protection Features="Over Current, Over Temperature, Short Circuit", PSRR="60dB (1kHz)", Supplier 1=Digi-Key

## Via types
v1: diameter 0.6, hole 0.3, Top Layer to Bottom Layer, tented both sides, 96 vias

## Nets (pads, with @x,y where several pads share a name; then routed paths per layer and width w, separated by ;. In a path a pad name is that pad's centre, name@x,y a point inside that pad or via, vN(x,y) a via of type N, cw(c..) or ccw(c..) an arc to the next point about the centre after c; other vN are vias at no path point)
+3V3: 3V3.1 C21.2 C22.2 J2.5 R11.1 R15.2 U4.5 | length 61.6
  Top Layer w0.25: R11.1 23.9,22.7 27.7,22.7 3V3.1
  Top Layer w0.3: U4.5 C22.2 22.1,50.7 22.5,51.1 R15.2 ; C21.2 R15.2 ; R11.1 22.6,25.6 25.6,28.6 25.6,34.5 28.2,37.1 v1(28.2,50.5) ; v1(24,52.1) R15.2
  Bottom Layer w0.3: J2.5 24,52.81 v1(24,52.1) 26.6,52.1 v1(28.2,50.5)
+5V: 5V.1 C17.2 C18.2 C19.2 J2.3 L2.2 R10.1 R13.1 U4.4 U4.8 | length 96.1
  Top Layer w0.25: R10.1 23.9,17.7 27.7,17.7 5V.1
  Top Layer w0.3: v1(11.7,53.3) C19.2 13.495,52.4 U4.4 ; L2.2 C17.2 C18.2 19.1,15.3 19.5,15.7 R13.1@20.7,15.7 ; U4.8 18.9,56.9 18,57.8 12.4,57.8 11.7,58.5 11.7,59.97 J2.3 14.03,62.3 19.7,62.3 27.3,54.7 27.3,38.8 24.7,36.2 24.7,29.45 21.5,26.25 21.5,21 22.6,19.9 R10.1 22.3,18.7 22.2,18.7 21.5,18 21.5,16.4 R13.1
  Bottom Layer w0.3: v1(11.7,53.3) 11.7,59.97 J2.3
+7V5: C5.2 C8.2 C9.2 D1.1 L1.2 R3.2 U2.1 | length 22.9
  Top Layer w0.25: U2.1 C8.2 C9.2 7.5,39.6 10.5,36.6 L1.2 10.5,31.3 ; D1.1 10.5,31.3 ; C5.2 12.2,36.3 R3.2 10.5,31.3
+12: 12V.1 J1.3 R7.1 | length 27.4
  Top Layer w0.3: v1(21.4,9) R7.1 v1(23.9,7.7)
  Bottom Layer w0.3: J1.3 6.73,6 18.4,6 v1(21.4,9) ; v1(23.9,7.7) 27.7,7.7 12V.1
+VBAT: C2.2 C13.2 C14.2 C15.2 J1.1 J4.1 R6.1 R12.2 U1.2 U3.3 VBAT.1 | length 9.2
  Top Layer w0.25: R6.1 24,2.7 27.7,2.7 VBAT.1
  Top Layer w1.2: C2.2 3.03,26.47 U1.2
+VBAT2: J4.3
DMB_GPIO1: J2.2
EN_7V5: J2.1 U2.3 | length 21
  Top Layer w0.3: U2.3 v1(10.2,41.6)
  Bottom Layer w0.25: J2.1 9,57.65 9,42.868 10.2,41.668 v1(10.2,41.6)
GND: C2.1 C3.1 C4.1 C5.1 C6.1 C7.1 C8.1 C9.1 C10.1 C11.1 C12.2 C13.1 C14.1 C15.1 C17.1 C18.1 C19.1 C20.1 C22.1 D2.1 D3.1 D4.1 D5.1 D6.1 D7.1 GND.1 J1.2 J1.4 J2.4 J2.6 J3.3 J3.4 J4.2 J4.4 R4.1 R5.1 R14.1 R16.1 U1.4 U1.9 U2.2 U3.1 U4.3 U4.9 | length 168.7
  Top Layer w0.25: v1(3,21.6) R4.1 ; C2.1 v1(3,29.3) ; v1(4.1,17.5) C13.1 C14.1 ; U1.4 4.85,22.818 4.9,22.768 v1(4.9,22.7) ; v1(5.6,41) C9.1 C8.1 v1(5.6,44.5) ; v1(5.9,17.5) C14.1 ; v1(7.7,17.5) C15.1 ; v1(8.9,39.9) C12.2 v1(9.8,39) ; U2.2 9.955,42.55 10.105,42.7 v1(10.2,42.7) ; v1(9.5,17.8) U3.1 C15.1 ; v1(10,55.2) C20.1 ; v1(10.7,54.3) C19.1 12.335,53.665 U4.3 ; C11.1 v1(14.5,45.2) ; R5.1 v1(15.1,33) ; v1(14.9,40.7) C10.1 ; v1(15.1,25.2) C4.1 C7.1 v1(15.1,26.8) ; C5.1 v1(16.6,36.7) ; v1(17,49.7) C22.1 ; C6.1 v1(18.1,23.6) ; v1(17.3,17.5) C17.1 C18.1 ; D2.1 v1(19.5,27.1) ; v1(19.1,17.5) C18.1 ; v1(20.2,16.6) C18.1 ; R16.1 v1(22.5,56.3) ; D4.1 v1(27.4,10) ; D5.1 v1(27.4,15) ; D6.1 v1(27.4,20) ; D7.1 v1(27.4,25) ; D3.1 v1(27.5,5) ; C14.1 C15.1
  Top Layer w0.3: v1(1,52) v1(1,56) ; v1(1,60) v1(1,64) ; v1(5,64) v1(9,64) ; v1(6,1) v1(10,1) ; v1(8,21) v1(11,21) ; v1(13,39) v1(17,39) ; v1(13,64) v1(17,64) ; v1(14,1) v1(18,1) ; v1(14,21) v1(17,21) ; v1(21,39) v1(25,39) ; v1(21,64) v1(25,64) ; v1(22,1) v1(26,1) ; v1(29,26) v1(29,30) ; v1(29,38) v1(29,42) ; v1(29,46) v1(29,50) ; v1(29,52) v1(29,56) ; v1(29,60) v1(29,64)
  Bottom Layer w0.3: v1(1,56) v1(1,60) ; v1(1,64) v1(5,64) ; v1(2,1) v1(6,1) ; v1(5,21) v1(8,21) ; v1(9,64) v1(13,64) ; v1(10,1) v1(14,1) ; v1(11,21) v1(14,21) ; v1(17,21) v1(20,21) ; v1(17,39) v1(21,39) ; v1(17,64) v1(21,64) ; v1(18,1) v1(22,1) ; v1(25,64) v1(29,64) ; v1(29,34) v1(29,38) ; v1(29,42) v1(29,46) ; v1(29,56) v1(29,60)
  other v1: 29,2.5 29,6.5 29,11.5 29,16.5 29,21.5 7.025,24.735 8.125,24.735 7.025,25.835 8.125,25.835 7.025,26.935 8.125,26.935 15.65,53.2 16.75,53.2 15.65,54.3 16.75,54.3 15.65,55.4 16.75,55.4
NetC1_1: C1.1 L1.1 R1.2 U1.1 | length 20.6
  Top Layer w0.25: L1.1@4,34.8 v1(4,32.5) C1.1 4.85,28.85 U1.1 ; R1.2 v1(13.9,29.5)
  Bottom Layer w0.25: v1(4,32.5) 4,30.7 4.5,30.2 13.2,30.2 v1(13.9,29.5)
NetC1_2: C1.2 D1.2 U1.8 | length 5.2
  Top Layer w0.25: C1.2 D1.2 7.35,29.675 7.675,29.35 7.7,29.35 9.31,27.74 U1.8
NetC3_2: C3.2 U1.5 | length 1.7
  Top Layer w0.25: C3.2 U1.5
NetC4_2: C4.2 R2.2 U1.6 | length 3.3
  Top Layer w0.25: U1.6 C4.2 R2.2
NetC6_2: C6.2 R2.1 | length 1.3
  Top Layer w0.25: R2.1 C6.2
NetC7_2: C7.2 D2.2 R1.1 R3.1 R5.2 U1.7 | length 11.8
  Top Layer w0.25: U1.7 11.67,26.47 C7.2 R1.1 12,30.9 R3.1 R5.2 D2.2
NetC12_1: C12.1 U2.4 | length 1.7
  Top Layer w0.25: C12.1 U2.4
NetC16_1: C16.1 U3.6 | length 2.2
  Top Layer w0.25: U3.6 C16.1
NetC16_2: C16.2 L2.1 U3.2 | length 10.7
  Top Layer w0.25: U3.2 10.35,15.65 10.8,16.1 10.8,19.1 11.6,19.9 13,19.9 C16.2 14.8,18.1 L2.1
NetC20_2: C20.2 U4.1 | length 1.6
  Top Layer w0.3: C20.2 11.905,56.205 U4.1
NetC21_1: C21.1 R15.1 R16.2 U4.6 | length 4.9
  Top Layer w0.3: U4.6 20.565,53.665 C21.1 ; R15.1 C21.1 ; R16.2 C21.1
NetD3_2: D3.2 R6.2 | length 1.4
  Top Layer w0.25: R6.2 D3.2
NetD4_2: D4.2 R7.2 | length 1.4
  Top Layer w0.25: R7.2 D4.2
NetD5_2: D5.2 R9.2 | length 1.4
  Top Layer w0.25: R9.2 D5.2
NetD6_2: D6.2 R10.2 | length 1.4
  Top Layer w0.25: R10.2 D6.2
NetD7_2: D7.2 R11.2 | length 1.4
  Top Layer w0.25: R11.2 D7.2
NetR4_2: R4.2 U1.3 | length 2.3
  Top Layer w0.25: R4.2 3.9,24.5 4.1,24.7 4.7,24.7 4.846,24.846 4.846,25.196 U1.3
NetR8_1: R8.1 U2.5 | length 2.1
  Top Layer w0.25: U2.5 11.729,42.521 12.479,42.521 R8.1
NetR12_1: R12.1 U3.5 | length 4
  Top Layer w0.25: R12.1 10.5,14.8 11.35,15.65 U3.5
NetR13_2: R13.2 R14.2 U3.4 | length 10.3
  Top Layer w0.25: U3.4 12.2,14.3 12.8,13.7 R13.2 R14.2@20.7,12.5
P7V5: 7V5.1 C10.2 C11.2 J3.1 J3.2 R8.2 R9.1 U2.6 | length 45.7
  Top Layer w0.25: C11.2 U2.6 R8.2 C10.2 23.34,35.06 J3.1 J3.2 ; v1(22.6,15) R9.1 23.9,12.7 27.7,12.7 7V5.1
  Bottom Layer w0.25: v1(22.6,15) 22.6,29.76 J3.2
pads on no net: FID1.0 FID2.0 FID3.0 FID4.0 FID5.0 FID6.0 J3.0 J4.0 MH1.0 MH2.0 MH3.0 MH4.0 U4.2 U4.7

## Polygon pours and split planes (outlines as drawn)
GND on Top Layer "NONET_L-01_P-001" (solid, remove dead copper, pour order 8): 0,9 7,9 7,4.5 16.5,4.5 16.5,1 24.5,1 24.5,8.5 14,8.5 14,12.5 11,12.5 11,16.5 3,16.5 3,36 5,36 5,46 18.5,46 18.5,43 24,43 24,50 0,50 0,65 30,65 30,0 0,0
+VBAT on Top Layer "NONET_L-01_P-001" (solid, remove dead copper, pour order 7): 17,1.5 24,1.5 24,8 13.5,8 13.5,12 10.5,12 10.5,16 10.45,15.95 2.5,15.95 2.5,21.5 2.5,25.1 3.94,25.1 3.94,27.8 2.5,27.8 2.5,36.5 4.5,36.5 4.5,44.5 4.5,46.5 19,46.5 19,43.5 23.5,43.5 23.5,49.5 0,49.5 0,9.5 7.5,9.5 7.5,5 17,5
GND on Bottom Layer "GND_L02_P001" (solid, remove dead copper, pour order 1): 0,65 30,65 30,0 0,0

## Silkscreen, mask and mechanical layers (free items; w line width, h text height)
Top Overlay:
  text "BAT" at 26.9,49.1 h1
  text "PMB" at 1,48 h1.5
  text "AV3.2" at 5.7,48 h0.8
  text "SOAR" at 3.4,46.6 h1
  text "RADIO" at 25.1,37.1 h1
Board Outline:
  the board outline again, w0.1

## Dimensions
0,0 to 0,65 on Dimensions (Mech10)
0,0 to 30,0 on Dimensions (Mech10)